# Altium PCB NEOIVClock.PcbDoc (part 2 of 2)
Units mm, origin at the board's own origin, x right, y up, seen from the top; angles counter-clockwise.
Board outline 205.8 x 119 mm, 2 copper layers (Top Layer, Bottom Layer); 87 components, 87 nets, 479 pads, 552 vias.
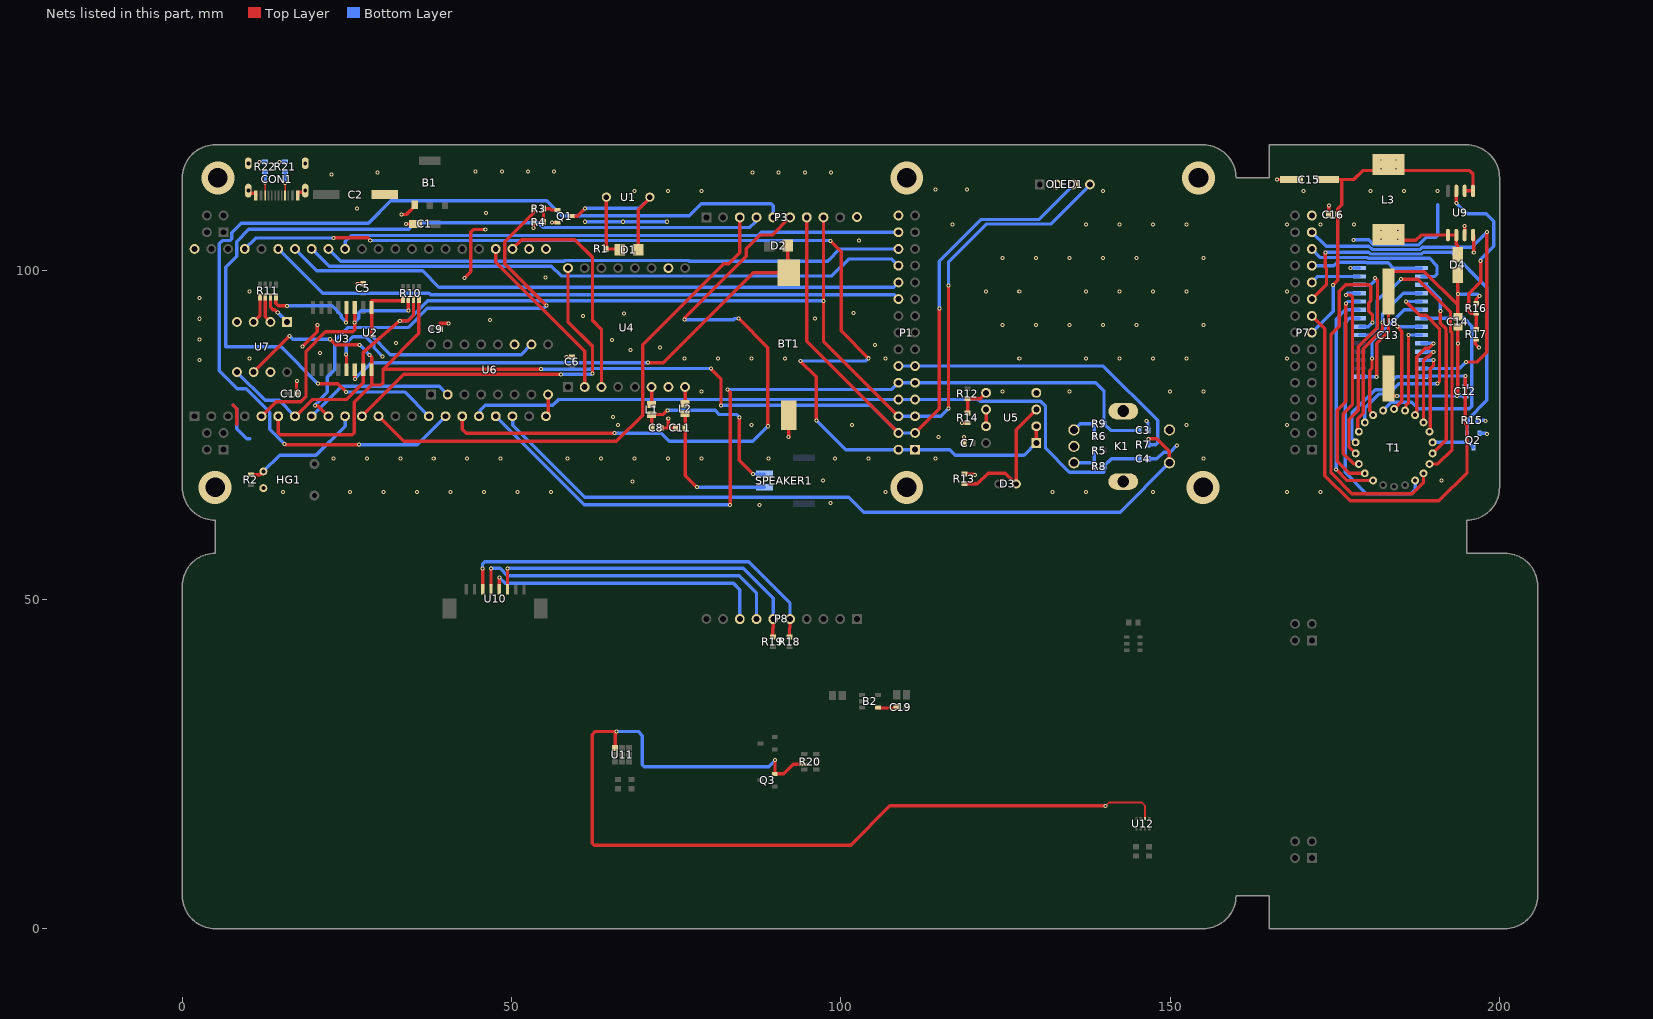
[diagram p2: the nets of this part, all layers, seen from the top]

## Via types
v1: diameter 0.61, hole 0.305, Top Layer to Bottom Layer, 519 vias
v2: diameter 5, hole 3, Top Layer to Bottom Layer, 12 vias
v3: diameter 0.4, hole 0.2, Top Layer to Bottom Layer, 8 vias
v4: diameter 3, hole 2, Top Layer to Bottom Layer, 6 vias
v5: diameter 3.5, hole 2, Top Layer to Bottom Layer, 4 vias
v6: diameter 0.65, hole 0.65, Top Layer to Bottom Layer, 2 vias
v7: diameter 0.61, hole 0.35, Top Layer to Bottom Layer, 1 vias

## Nets (pads, with @x,y where several pads share a name; then routed paths per layer and width w, separated by ;. In a path a pad name is that pad's centre, name@x,y a point inside that pad or via, vN(x,y) a via of type N, cw(c..) or ccw(c..) an arc to the next point about the centre after c; other vN are vias at no path point) (continued)
B_I2C_SDA_1.8: Q3.2 R20.7 U11.1 U12.3 | length 147.9
  Top Layer w0.254: v1(140.208,18.637) 140.716,19.145 145.669,19.145 146.177,18.637 U12.3@146.177,16.754
  Top Layer w0.508: U11.1@65.718,27.434 v1@65.718,29.717 ; v1(65.913,29.94) 62.738,29.94 62.23,29.432 62.23,12.966 62.528,12.668 101.481,12.668 107.45,18.637 v1(140.208,18.637) ; Q3.2@89.937,23.505 Q3.2@89.996,23.505 ; v1(89.996,25.583) Q3.2@89.996,23.505 ; R20.7@94.412,24.949 92.79,24.949 91.346,23.505 Q3.2@89.996,23.505
  Bottom Layer w0.508: v1(65.913,29.94) 69.215,29.94 69.85,29.305 69.85,24.904 70.148,24.606 89.019,24.606 v1(89.996,25.583)
B_PMS5003ST_RESET: P8.5 R18.2 U10.6 | length 58.5
  Top Layer w0.508: v1(45.593,54.705) 45.613,54.685 45.613,54.404 45.623,54.393 U10.6@45.623,51.509 ; R18.2@92.202,44.279 92.202,45.598 92.27,45.666 P8.5@92.27,47
  Bottom Layer w0.508: v1(45.593,54.705) 45.593,55.423 45.891,55.721 85.994,55.721 92.27,49.445 P8.5@92.27,47
B_PMS5003ST_RX: P8.7 U10.5 | length 48.5
  Top Layer w0.508: v1(46.863,54.705) 46.863,53.359 46.873,53.349 U10.5@46.873,52.055
  Bottom Layer w0.508: v1(46.863,54.705) 48.245,54.705 49.356,53.594 84.55,53.594 87.19,50.954 P8.7@87.19,47
B_PMS5003ST_SET: P8.6 R19.1 U10.3 | length 50.8
  Top Layer w0.508: U10.3@49.373,52.055 49.373,54.647 49.403,54.677 v1(49.403,54.705) ; R19.1@89.662,44.279 89.662,45.598 89.73,45.666 P8.6@89.73,47
  Bottom Layer w0.508: v1@49.435,54.737 49.447,54.725 49.495,54.725 49.507,54.737 85.185,54.737 89.73,50.192 P8.6@89.73,47
B_PMS5003ST_TX: P8.8 U10.4 | length 43.4
  Top Layer w0.508: U10.4@48.133,51.626 v1(48.133,53.308)
  Bottom Layer w0.508: v1(48.133,53.308) 49.022,52.419 83.693,52.419 84.65,51.462 P8.8@84.65,47
BEEPER: R3.1 U2.9 | length 67.4
  Top Layer w0.508: v1(20.134,79.434) 20.154,79.415 20.578,79.415 U2.9@22.19,77.803 ; R3.1@53.352,109.313 53.352,108.726 48.95,104.324 48.95,100.928 v1(55.3,94.578)
  Bottom Layer w0.508: v1(20.134,79.434) 20.995,80.295 20.995,80.442 22.026,81.472 22.026,83.758 23.143,84.876 23.143,89.262 25.146,91.265 34.282,91.265 37.189,94.172 54.893,94.172 v1(55.3,94.578)
DPF_PLAYER_BSY: U2.11 U4.16 | length 55.2
  Top Layer w0.508: U2.11@27.27,77.803 33.62,84.153 v1(57.465,84.153) ; U4.16@58.561,100.282 58.561,92.13 62.285,88.406 v1(62.285,84.28)
  Bottom Layer w0.508: v1(57.465,84.153) 62.13,84.153 62.257,84.28 v1(62.285,84.28)
DPF_PLAYER_RX: U2.25 U4.3 | length 34.1
  Top Layer w0.508: U2.25@50.13,103.203 51.513,104.586 59.618,104.586 62.285,101.919 62.285,92.394 63.641,91.038 U4.3@63.641,82.248
DPF_PLAYER_TX: U2.26 U4.2 | length 26.6
  Top Layer w0.508: U2.26@47.59,103.203 47.59,101.196 61.101,87.685 U4.2@61.101,82.248
DS3231_32HZ: R10.5 U3.1 U6.10 | length 36.4
  Top Layer w0.508: v1(28.744,89.994) U3.1@28.744,94.302 28.744,95.315 33.513,95.315 R10.5@33.513,95.521
  Bottom Layer w0.508: v1(28.744,89.994) 31.601,87.136 51.436,87.136 U6.10@53.001,88.701
DS3231_CLK: U2.8 U6.2 | length 23.1
  Bottom Layer w0.508: U2.8@19.65,77.803 24.222,82.375 39.007,82.375 U6.2@40.301,81.081
DS3231_INT: R10.6 U2.5 U3.3 | length 38
  Top Layer w0.508: U2.5@12.03,77.803 14.251,80.024 17.969,80.024 18.796,80.851 18.796,87.691 21.735,90.63 25.864,90.63 26.162,90.928 26.162,92.055 26.204,92.096 U3.3@26.204,94.302 ; v1(34.313,93.842) R10.6@34.313,95.521
  Bottom Layer w0.508: v1(26.162,92.027) 26.162,92.055 26.772,92.664 26.772,93.483 27.131,93.842 v1(34.313,93.842)
DS3231_RST: R11.4 U3.4 | length 15.4
  Top Layer w0.508: R11.4@14.196,95.902 14.196,94.976 14.585,94.587 15.855,94.587 v1(15.875,94.567) ; v1(24.892,92.027) 24.892,92.055 24.934,92.096 U3.4@24.934,94.302
  Bottom Layer w0.508: v1(15.875,94.567) 22.733,94.567 24.148,93.152 24.148,92.792 24.892,92.049 v1(24.892,92.027)
EC11_A: C3.2 P1.9 P1.10 R9.2 U2.19 | length 127.6
  Top Layer w0.508: v1(82.804,81.867) 82.804,81.839 83.185,81.458 v1(83.185,64.341)
  Bottom Layer w0.508: U2.19@47.59,77.803 61.052,64.341 v1(83.185,64.341) ; v1(82.804,81.867) 107.717,81.867 P1.10@108.73,82.88 P1.9@111.27,82.88 138.712,82.88 139.942,81.65 R9.2@139.942,76.66 140.958,75.644 C3.2@145.223,75.644
EC11_B: C4.2 P1.7 P1.8 R8.2 U2.18 | length 111.3
  Bottom Layer w0.508: U2.18@45.05,77.803 45.24,77.993 45.24,78.72 45.974,79.454 56.261,79.454 57.147,80.34 P1.8@108.73,80.34 P1.7@111.27,80.34 120.871,80.34 121.136,80.075 130.306,80.075 131.068,79.313 131.068,72.938 134.7,69.305 139.942,69.305 R8.2@139.942,70.183 141.085,71.326 C4.2@145.223,71.326
EC11_C: K1.3 P1.11 P1.12 R7.2 U2.20 | length 163.9
  Top Layer w0.508: v1(146.673,74.36) 147.969,74.36 149.875,72.454 K1.3@149.875,70.731
  Bottom Layer w0.508: U2.20@50.165,77.768 50.165,76.406 61.087,65.484 101.219,65.484 103.457,63.246 142.39,63.246 K1.3@149.875,70.731 ; P1.12@108.73,85.42 P1.11@111.27,85.42 139.845,85.42 148.082,77.183 148.082,73.783 147.784,73.485 R7.2@146.673,73.485 v1(146.673,74.36)
GND: B1.1 BT1.2 C1.2 C2.2 C3.1 C4.1 C5.1 C6.2 C7.1 C8.1 C9.1 C10.1 C11.2 CON1.1 CON1.2 CON1.13 HG1.1 K1.1 K1.2 K1.5 OLED1.2 P1.30 P3.10 Q1.2 R4.2 R13.2 R14.2 R21.2 R22.2 U2.22 U2.23 U2.24 U2.44 U3.13 U4.7 U4.10 U5.4 U6.8 U6.11 U7.4 U7.7 | length 85
  Top Layer w0.5: 7.747,79.454 8.255,78.946 8.255,76.533 ; CON1.2@17.549,111.305 17.549,111.805 18.438,111.805 18.669,112.036 CON1.1@18.669,112.055 ; v1(42.826,98.774) 43.815,99.763 43.815,105.743 44.212,106.14 v1(46.001,106.14)
  Top Layer w0.508: CON1.1@10.176,111.633 10.223,111.68 11.145,111.68 11.149,111.676 CON1.13@11.149,111.305 ; C10.1@17.337,81.232 17.337,83.047 17.399,83.109 v1(17.399,83.137) ; v1(18.24,88.386) 20.506,90.652 20.506,91.668 v1(20.526,91.688) ; v1(24.892,87.201) 24.892,87.173 24.934,87.132 U3.13@24.934,84.878 ; v1(26.592,97.91) C5.1@27.474,97.91 ; v1(33.274,108.41) 33.294,108.43 34.02,108.43 35.302,109.711 B1.1@35.302,109.886 ; v1(33.998,106.999) C1.2@35.43,106.999 ; C9.1@39.181,91.011 39.181,91.893 v1(40.451,91.893) ; v1(53.352,106.399) R4.2@53.352,107.281 ; U2.22@55.21,77.803 55.21,78.071 55.541,78.402 U6.8@55.541,81.081 ; v1(56.107,107.22) Q1.2@56.964,107.22 ; v1(58.314,86.758) C6.2@59.196,86.758 ; C8.1@72.807,76.221 72.807,76.171 C8.1@72.661,76.025 73.801,76.025 ; v1(73.787,77.422) 73.787,76.039 73.801,76.025 ; C11.2@74.941,76.025 73.801,76.025 ; C11.2@74.991,76.025 C11.2@75.087,76.025 ; v1(92.075,74.628) BT1.2@92.075,77.946 ; v1(118.371,76.791) R14.2@119.253,76.791 ; C7.1@118.672,73.731 v1(118.672,74.613) ; R13.2@118.745,69.028 120.253,69.028 120.368,68.913 v1(120.396,68.913)
  Bottom Layer w0.5: 7.747,79.454 8.255,78.946 8.255,75.898 9.779,74.374 10.287,74.374 ; v1(24.892,87.201) 24.892,88.852 25.908,89.868 27.839,89.868 29.12,88.587 29.12,88.162 v1(30.421,86.86)
  Bottom Layer w0.508: v1(11.691,116.399) R22.2@12.573,116.399 ; v1(14.739,116.399) R21.2@15.621,116.399 ; v1(61.164,107.329) v1(66.879,107.329) v1(73.61,107.329) ; v1(146.424,77.048) 146.424,77.02 146.623,76.821 C3.1@146.623,75.644 ; C4.1@146.623,71.326 147.99,71.326 148.996,72.332 149.977,72.332 v1(151.003,73.358)
  other v1: 87.657,64.357 98.452,64.611 15.32,66.28 25.48,66.28 30.56,66.28 35.64,66.28 40.72,66.28 45.8,66.28 50.88,66.28 55.96,66.28 106.76,66.28 132.16,66.28 137.24,66.28 147.4,66.28 68.353,67.913 97.309,68.04 22.94,71.36 28.02,71.36 33.1,71.36 38.18,71.36 43.26,71.36 48.34,71.36 58.5,71.36 63.58,71.36 68.66,71.36 73.74,71.36 78.82,71.36 88.98,71.36 99.14,71.36 104.22,71.36 114.38,71.36 155.02,71.36 114.835,74.644 66.12,76.44 86.44,76.44 101.68,76.44 152.48,76.44 65.405,77.676 78.82,81.52 124.54,81.52 134.7,81.52 149.94,81.52 155.02,81.52 2.619,86.354 10.24,86.6 76.28,86.6 81.36,86.6 86.44,86.6 91.52,86.6 106.76,86.6 127.08,86.6 137.24,86.6 142.32,86.6 147.4,86.6 152.48,86.6 20.907,87.37 68.072,87.836 72.517,88.217 105.183,88.614 32.418,88.955 65.278,89.36 2.619,89.478 124.54,91.68 129.62,91.68 134.7,91.68 139.78,91.68 144.86,91.68 155.02,91.68 46.736,92.408 2.619,92.602 96.045,92.638 60.833,93.043 67.056,93.424 101.881,93.44 2.619,95.726 10.24,96.76 122,96.76 127.08,96.76 137.24,96.76 142.32,96.76 147.4,96.76 152.48,96.76 55.145,98.901 124.54,101.84 129.62,101.84 134.7,101.84 139.78,101.84 144.86,101.84 155.02,101.84 102.77,104.489 116.92,106.92 137.24,106.92 142.32,106.92 147.4,106.92 152.48,106.92 46.101,108.664 26.5,109.312 68.66,112 73.74,112 78.82,112 139.78,112 114.327,112.236 119.153,112.236 22.633,114.522 86.566,114.802 90.545,114.802 94.524,114.802 98.504,114.802 29.643,114.815 44.529,114.929 48.508,114.929 52.487,114.929 56.467,114.929
  other v2: 5,67 110,67 155,67 5.395,114 110,114 154.305,114
I2C_SCL: OLED1.3 P1.3 P1.4 P3.7 R10.8 U2.6 U3.16 U7.6 | length 244.2
  Top Layer w0.508: U7.6@10.837,84.51 10.837,84.53 16.257,89.95 v1(16.257,89.97) ; U2.6@14.57,77.803 14.57,75.307 14.868,75.009 25.792,75.009 26.09,75.307 26.09,79.897 28.744,82.551 ; v1(22.45,89.488) 23.299,88.64 v1(26.924,88.64) ; v1(28.448,87.074) 28.448,87.046 28.744,86.751 28.744,82.551 ; R10.8@35.913,95.521 35.913,90.392 30.48,84.96 ; v1(54.483,84.96) 30.48,84.96 ; v1(80.264,85.042) 81.788,83.518 v1(81.788,79.454) ; P3.7@94.81,108 94.81,89.18 P1.4@108.73,75.26 ; P1.3@110.977,74.967 P1.3@111.27,75.26 114.935,78.925 v1(114.935,94.186) ; 28.744,82.551 30.182,82.551 30.48,82.849 30.48,84.96
  Bottom Layer w0.508: v1(16.257,89.97) 16.284,89.97 16.766,89.488 v1(22.45,89.488) ; v1(26.924,88.64) 26.924,88.619 28.448,87.095 v1(28.448,87.074) ; v1(54.483,84.96) 61.933,84.96 62.016,85.042 v1(80.264,85.042) ; v1(81.788,79.454) 104.536,79.454 P1.4@108.73,75.26 P1.3@111.27,75.26 ; v1(114.935,94.186) 114.935,101.298 121.314,107.677 130.109,107.677 135.288,112.856 OLED1.3@135.288,112.982
I2C_SDA: OLED1.4 P1.5 P1.6 P3.8 R10.7 U2.7 U3.15 U7.5 | length 198.1
  Top Layer w0.508: U2.7@17.11,77.803 17.236,77.803 19.776,80.343 24.961,80.343 27.474,82.856 U3.15@27.474,84.878 27.474,87.477 27.635,87.638 32.001,91.43 v1@32.992,92.281 ; v1(33.02,92.281) 34.29,92.281 35.113,93.104 R10.7@35.113,95.521 ; P3.8@97.35,108 v1(97.35,95.315) 97.35,89.18 P1.6@108.73,77.8 ; v1(116.332,78.946) v1(116.332,97.615)
  Bottom Layer w0.508: U7.5@8.297,84.51 12.591,80.216 14.697,80.216 U2.7@17.11,77.803 ; v1(33.02,92.281) 34.232,92.281 37.266,95.315 v1(97.35,95.315) ; P1.6@108.73,77.8 P1.5@111.27,77.8 115.186,77.8 v1(116.332,78.946) ; v1(116.332,97.615) 116.332,101.171 122.16,106.999 131.971,106.999 137.81,112.838 OLED1.4@137.81,113
IV18_BLANK: P1.22 U2.38 | length 94.3
  Bottom Layer w0.508: U2.38@17.11,103.203 20.426,99.887 36.478,99.887 38.967,97.398 108.008,97.398 P1.22@108.73,98.12
IV18_CLK: P1.24 U2.37 | length 92.3
  Bottom Layer w0.508: U2.37@19.65,103.203 22.28,100.573 56.036,100.573 57.509,99.1 98.632,99.1 101.197,101.665 107.725,101.665 P1.24@108.73,100.66
IV18_DIN: P1.28 U2.35 | length 85.7
  Bottom Layer w0.508: U2.35@24.73,103.203 24.73,104.344 25.621,105.235 87.376,105.235 87.881,105.74 P1.28@108.73,105.74
IV18_EN: P1.20 U2.39 | length 97.3
  Bottom Layer w0.508: U2.39@14.57,103.203 21.315,96.458 37.469,96.458 37.697,96.229 108.081,96.229 P1.20@108.73,95.58
IV18_LOAD: P1.26 U2.36 | length 88.2
  Bottom Layer w0.508: U2.36@22.19,103.203 24.042,101.351 57.97,101.351 58.075,101.456 76.827,101.456 76.932,101.351 97.988,101.351 99.837,103.2 P1.26@108.73,103.2
LIGHT_SENSOR: P1.1 P1.2 U2.41 U5.1 U5.2 | length 169.5
  Top Layer w0.508: v1@22.983,104.889 22.999,104.874 23.075,104.874 23.09,104.889 28.191,104.889 28.52,104.56 28.52,104.493 v1(28.54,104.473) ; v1(93.853,86.185) 96.266,83.772 v1(96.266,77.168) ; v1(98.429,104.383) 100.029,102.783 100.029,90.743 v1(104.169,86.603) ; U5.1@129.667,73.739 U5.2@129.667,76.279
  Bottom Layer w0.508: U2.41@9.49,103.203 11.141,104.854 v1(22.983,104.854) ; v1(28.54,104.473) 98.311,104.473 98.401,104.383 v1(98.429,104.383) ; v1(93.853,86.185) 103.724,86.185 104.142,86.603 v1(104.169,86.603) ; v1(96.266,77.168) 100.714,72.72 P1.2@108.73,72.72 P1.1@111.27,72.72 116.514,72.72 117.357,71.877 127.805,71.877 U5.1@129.667,73.739
MOTION_SW: HG1.2 R2.2 U2.10 | length 18.9
  Top Layer w0.508: R2.2@10.414,68.913 11.811,68.913 HG1.2@12.319,69.421
  Bottom Layer w0.508: HG1.2@12.319,69.421 14.778,71.881 20.302,71.881 24.73,76.308 U2.10@24.73,77.803
NetB2_4: B2.4 C19.2 | length 2.8
  Top Layer w0.508: B2.4@105.625,33.562 105.691,33.496 C19.2@108.393,33.496
NetBT1_1: BT1.1 D2.2 U3.14 | length 78.1
  Top Layer w0.508: v1(26.191,83.479) 26.204,83.491 U3.14@26.204,84.878 ; v1(70.717,85.942) 73.036,85.942 86.69,99.596 BT1.1@92.075,99.596 92.075,101.589 91.951,101.713 D2.2@91.951,103.711
  Bottom Layer w0.508: v1(26.191,83.479) 28.655,85.942 v1(70.717,85.942)
NetC8_2: C8.2 L1.1 SPEAKER1.2 | length 27.3
  Top Layer w0.508: C8.2@71.261,76.025 L1.1@71.261,78.069 73.009,78.069 73.632,78.692 v1(73.66,78.692) ; v1(84.582,77.582) 84.582,71.113 v1(86.669,69.026)
  Bottom Layer w0.508: v1(73.66,78.692) 80.899,78.692 81.534,78.057 84.21,78.057 84.562,77.704 84.562,77.629 v1@84.582,77.629 ; v1(86.669,69.026) 86.671,69.024 SPEAKER1.2@88.392,69.024
NetC11_1: C11.1 L2.1 SPEAKER1.1 | length 22.2
  Top Layer w0.508: L2.1@76.341,78.196 C11.1@76.341,76.025 76.341,68.797 v1(78.114,67.024)
  Bottom Layer w0.508: v1(78.114,67.024) SPEAKER1.1@88.392,67.024
NetCON1_5: CON1.5 R21.1 | length 3.6
  Top Layer w0.254: CON1.5@15.599,111.305 15.601,111.307 15.601,112.005 15.621,112.025 v1(15.621,113.236)
  Bottom Layer w0.508: v1(15.621,113.236) R21.1@15.621,114.899
NetCON1_11: CON1.11 R22.1 | length 4.3
  Top Layer w0.254: v1@12.573,113.188 v1(12.573,113.284) 12.597,113.26 12.597,111.307 CON1.11@12.599,111.305 CON1.11@12.599,111.926
  Bottom Layer w0.508: v1(12.573,113.284) R22.1@12.573,114.899
NetD1_1: D1.1 Q1.3 U1.2 | length 22
  Top Layer w0.508: Q1.3@59.114,108.17 59.973,108.17 v1(61.164,109.361) ; D1.1@69.218,103.076 69.218,109.177 U1.2@71.118,111.077
  Bottom Layer w0.508: v1(61.164,109.361) 69.402,109.361 U1.2@71.118,111.077
NetD1_2: D1.2 R1.2 U1.1 | length 10
  Top Layer w0.508: U1.1@64.391,111.077 64.391,107.064 64.377,107.05 R1.2@64.377,103.203 66.291,103.203 D1.2@66.418,103.076
NetD3_1: D3.1 R13.1 U5.3 | length 21.8
  Top Layer w0.508: R13.1@118.745,67.528 120.73,67.528 122.369,69.167 124.968,69.167 D3.1@126.619,67.516 126.619,75.771 U5.3@129.667,78.819
NetD4_1: D4.1 L3.2 U9.5 U9.6 | length 13.6
  Top Layer w0.508: L3.2@183.261,104.507 187.303,104.507 188.111,105.315 U9.5@192.17,105.315 U9.6@193.44,105.315 193.44,103.916 193.659,103.697 D4.1@193.659,102.316
  other v3: 181.994,104.696 184.534,104.696 181.994,105.996 184.534,105.996
NetK1_4: K1.4 R6.2 R9.1 | length 5.4
  Bottom Layer w0.508: K1.4@135.375,75.731 136.304,76.66 R9.1@138.442,76.66 R6.2@138.442,74.755
NetK1_6: K1.6 R5.2 R8.1 | length 5.5
  Bottom Layer w0.508: K1.6@135.375,70.731 138.442,70.731 ; R8.1@138.442,70.183 138.442,70.731 ; R5.2@138.442,72.596 138.442,70.731
NetL1_2: L1.2 U4.6 | length 2.7
  Top Layer w0.508: L1.2@71.261,79.569 U4.6@71.261,82.248
NetL2_2: L2.2 U4.8 | length 2.6
  Top Layer w0.508: L2.2@76.341,79.696 U4.8@76.341,82.248
NetQ1_1: Q1.1 R3.2 R4.1 | length 4.2
  Top Layer w0.508: R4.1@54.852,107.281 R3.2@54.852,109.313 55.808,109.313 56.001,109.12 Q1.1@56.964,109.12
NetQ2_3: Q2.3 T1.13 | length 6.5
  Bottom Layer w0.508: T1.13@189.84,73.84 195.242,73.84 Q2.3@196.021,73.06
NetR11_1: R11.1 U7.3 | length 4.2
  Top Layer w0.508: U7.3@10.837,92.13 11.796,93.089 R11.1@11.796,95.902
NetR11_2: R11.2 U7.2 | length 4.1
  Top Layer w0.508: R11.2@12.596,95.902 12.596,92.911 U7.2@13.377,92.13
NetR11_3: R11.3 U7.1 | length 5
  Top Layer w0.508: R11.3@13.396,95.902 13.396,94.337 13.755,93.978 14.041,93.978 14.468,93.551 v1(14.496,93.551)
  Bottom Layer w0.508: v1(14.496,93.551) U7.1@15.917,92.13
NetR12_2: R12.2 R14.1 U5.5 | length 5.3
  Top Layer w0.508: R14.1@119.253,78.291 R12.2@119.253,80.474 121.162,80.474 U5.5@122.047,81.359
NetR16_2: R16.2 R17.1 U9.3 | length 27.5
  Top Layer w0.508: U9.3@193.44,112.015 193.447,112.008 193.447,110.171 v1(193.454,110.164) ; R17.1@196.466,91 R16.2@196.466,93.34 ; R16.2@196.469,93.436 196.453,93.452 195.624,93.452 195.326,93.75 195.326,96.403 197.137,98.215 v1(197.137,101.401)
  Bottom Layer w0.508: v1(193.454,110.164) 195.081,108.537 197.993,108.537 199.136,107.394 199.136,103.645 197.157,101.665 197.157,101.42 v1(197.137,101.401)
NetU5_6: U5.6 U5.7 | length 2.5
  Top Layer w0.508: U5.7@122.047,76.279 U5.6@122.047,78.819
PMS5003ST_RESET: P3.6 U2.17 | length 99.8
  Top Layer w0.508: U2.17@42.51,77.803 42.51,75.806 43.092,75.224 v1(65.637,75.224) ; v1(76.276,92.459) 76.295,92.479 76.295,92.757 85.631,102.093 85.631,103.251 87.689,105.309 89.579,105.309 P3.6@92.27,108 ; v1(84.455,92.662) 88.9,88.217 v1(88.9,76.279)
  Bottom Layer w0.508: v1(65.637,75.224) 72.728,75.224 73.924,74.027 86.648,74.027 v1(88.9,76.279) ; v1(76.276,92.459) 83.718,92.459 83.901,92.642 84.435,92.642 v1(84.455,92.662)
PMS5003ST_RX: P3.4 U2.15 | length 133.2
  Top Layer w0.508: v1(20.583,82.747) 23.631,82.747 v1(24.892,81.486)
  Bottom Layer w0.508: v1(20.583,82.747) 14.999,88.331 6.604,88.331 6.604,100.409 8.255,102.06 8.255,104.328 10.113,106.186 34.421,106.186 35.386,107.151 54.08,107.151 54.766,106.466 86.194,106.466 87,107.272 87,107.81 P3.4@87.19,108 ; v1(24.892,81.486) 33.747,81.486 U2.15@37.43,77.803
PMS5003ST_SET: P3.5 U2.16 | length 152.5
  Top Layer w0.508: v1(15.494,73.612) 15.522,73.612 15.649,73.485 v1@26.821,73.485
  Bottom Layer w0.508: v1(15.494,73.612) 13.288,75.818 13.288,78.373 9.681,81.98 8.31,81.98 5.588,84.702 5.588,103.965 6.096,104.473 7.199,104.473 7.497,104.771 7.497,105.653 8.97,107.126 28.274,107.126 31.652,110.504 55.35,110.504 57.636,108.218 76.966,108.218 78.809,110.061 89.432,110.061 89.73,109.763 P3.5@89.73,108 ; v1(26.848,73.485) 35.652,73.485 U2.16@39.97,77.803
PMS5003ST_TX: P3.3 U2.12 | length 79.9
  Top Layer w0.508: U2.12@29.81,77.803 33.634,73.979 65.917,73.979 69.905,77.967 69.905,88.653 82.204,100.952 82.966,100.952 84.65,102.636 P3.3@84.65,108
R_3.3V: C12.2 P7.17 T1.1 U8.28 | length 90.8
  Top Layer w0.508: P7.17@171.5,93.04 173.482,91.058 173.482,68.786 177.306,64.962 190.783,64.962 195.072,69.251 195.072,76.434 194.818,76.688 v1(194.818,83.899)
  Bottom Layer w0.508: T1.1@178.16,73.84 177.601,74.4 177.601,78.348 181.098,81.845 182.409,81.845 184.351,83.787 U8.28@188.161,83.787 188.232,83.858 189.126,83.858 189.167,83.899 v1(194.818,83.899) C12.2@194.818,82.167
R_5V: C15.1 C16.2 L3.1 P7.15 U9.1 U9.2 | length 51.9
  Top Layer w0.508: C15.1@173.863,113.744 176.045,113.744 ; v1(174.752,97.742) 174.752,97.77 175.452,98.47 175.452,109.292 176.045,109.885 176.045,113.744 ; U9.2@194.71,112.015 U9.1@195.98,112.015 195.98,114.578 195.451,115.107 183.261,115.107 179.243,115.107 177.88,113.744 176.045,113.744
  Bottom Layer w0.508: P7.15@171.5,90.5 174.752,93.752 v1(174.752,97.742)
  other v3: 181.994,115.396 184.274,115.396 181.994,116.696 184.274,116.696
R_50V: C13.1 C14.2 D4.2 R16.1 U8.1 | length 40.7
  Top Layer w0.508: v1(181.356,83.772) 181.356,88.852 183.134,90.63 C13.1@183.134,96.733 ; C13.1@183.131,99.128 183.777,99.774 188.595,99.774 193.659,94.71 ; D4.2@193.659,99.266 v1(193.659,96.346) 193.659,94.71 ; C14.2@194.003,93.082 193.659,93.426 193.659,94.71 ; 196.466,94.556 196.466,95.58 v1(196.977,96.091)
  Bottom Layer w0.508: U8.1@178.736,83.787 178.744,83.78 181.348,83.78 v1(181.356,83.772) ; v1(193.659,96.346) 196.694,96.346 196.949,96.091 v1(196.977,96.091)
R_A: T1.12 U8.17 | length 28.4
  Top Layer w0.508: T1.12@189.84,72.16 191.897,74.217 191.897,90.374 191.873,90.398 191.873,91.069 191.008,91.934 v1(191.008,93.805)
  Bottom Layer w0.508: U8.17@188.161,97.757 188.798,97.757 191.008,95.547 v1(191.008,93.805)
R_B: T1.10 U8.7 | length 58.9
  Top Layer w0.508: v1(180.721,92.027) 180.721,93.17 180.141,93.75 180.141,94.992 180.467,95.319 180.467,97.444 180.169,97.742 176.624,97.742 175.641,96.759 175.641,91.45 174.416,90.225 174.416,69.214 177.575,66.054 186.77,66.054 188.459,67.743 T1.10@188.459,69.136
  Bottom Layer w0.508: U8.7@178.752,91.392 178.759,91.399 180.093,91.399 v1@180.701,92.007
R_C: T1.4 U8.10 | length 31.6
  Top Layer w0.508: v1(176.657,94.948) 176.657,79.985 175.387,78.715 175.387,70.935 177.185,69.137 T1.4@179.541,69.137
  Bottom Layer w0.508: v1(176.657,94.948) 176.685,94.948 176.946,95.21 178.729,95.21 U8.10@178.736,95.217
R_D: T1.3 U8.11 | length 30.7
  Top Layer w0.508: v1(176.664,96.211) 177.375,96.211 177.673,95.913 177.673,79.538 176.276,78.141 176.276,72.137 177.863,70.55 T1.3@178.633,70.55
  Bottom Layer w0.508: v1(176.664,96.211) 176.692,96.211 176.969,96.487 U8.11@178.736,96.487
R_DP: T1.2 U8.12 | length 32
  Top Layer w0.508: T1.2@178.16,72.161 177.136,73.185 177.136,77.27 178.562,78.696 178.562,88.367 181.483,91.288 181.483,98.349 181.102,98.73 v1(181.102,98.758)
  Bottom Layer w0.508: U8.12@178.736,97.757 180.482,97.757 181.082,98.357 181.082,98.738 v1(181.102,98.758)
R_E: T1.5 U8.9 | length 33.3
  Top Layer w0.508: v1(175.188,69.737) 176.888,68.037 T1.5@180.81,68.037
  Bottom Layer w0.508: v1(175.188,69.737) 175.188,92.525 176.61,93.947 U8.9@178.736,93.947
R_F: T1.11 U8.6 | length 47.2
  Top Layer w0.508: v1(185.064,98.61) 187.6,98.61 192.551,93.659 192.551,90.678 192.786,90.443 192.786,72.705 190.63,70.549 T1.11@189.367,70.549
  Bottom Layer w0.508: U8.6@178.736,90.137 180.42,90.137 181.45,91.167 181.45,95.405 182.858,96.813 183.266,96.813 v1(185.064,98.61)
R_G: T1.9 U8.8 | length 38.7
  Bottom Layer w0.508: U8.8@178.736,92.677 177.22,92.677 176.559,92.017 176.559,69.28 179.785,66.054 186.504,66.054 187.189,66.74 T1.9@187.189,68.036
R_G1: T1.15 U8.25 | length 13.3
  Top Layer w0.508: T1.15@188.459,76.864 188.459,86.303 189,86.844 189.226,86.844 189.964,87.582 v1(189.992,87.582)
  Bottom Layer w0.508: U8.25@188.161,87.597 189.977,87.597 v1(189.992,87.582)
R_G2: T1.22 U8.18 | length 26.7
  Top Layer w0.508: T1.22@178.633,75.452 178.49,75.595 178.49,77.451 179.324,78.285 179.324,88.062 182.225,90.964 182.225,92.007 v1(182.245,92.027)
  Bottom Layer w0.508: v1(182.245,92.027) 182.238,92.034 182.238,93.348 185.377,96.487 U8.18@188.161,96.487
R_G3: T1.16 U8.24 | length 14.2
  Top Layer w0.508: T1.16@187.19,77.963 187.322,78.096 187.322,78.477 187.452,78.607 187.452,86.82 188.731,88.099 189.236,88.099 v1(189.992,88.852) v1(189.992,88.852)
  Bottom Layer w0.508: U8.24@188.161,88.867 188.168,88.86 189.984,88.86 v1(189.992,88.852)
R_G4: T1.21 U8.19 | length 32.4
  Top Layer w0.508: v1(185.801,95.202) 187.861,93.142 188.841,93.142 190.881,91.102 190.881,83.071 190.594,82.784 v1(190.594,82.756)
  Bottom Layer w0.508: T1.21@179.542,76.864 179.542,79.019 181.69,81.167 183.087,81.167 184.676,82.756 v1(190.594,82.756) ; v1(185.801,95.202) 185.809,95.21 188.153,95.21 U8.19@188.161,95.217
R_G5: T1.17 U8.23 | length 13.6
  Top Layer w0.508: T1.17@185.662,78.661 185.789,78.788 185.789,79.445 186.182,79.838 v1@186.182,90.094
  Bottom Layer w0.508: v1(186.182,90.122) 186.19,90.13 188.153,90.13 U8.23@188.161,90.137
R_G6: T1.20 U8.20 | length 21
  Top Layer w0.508: v1(180.627,86.566) 180.627,85.075 180.274,84.722 180.274,78.607 180.811,78.07 T1.20@180.811,77.964
  Bottom Layer w0.508: v1(180.627,86.566) 180.627,89.074 185.5,93.947 U8.20@188.161,93.947
R_G7: T1.19 U8.21 | length 34.9
  Bottom Layer w0.508: T1.19@182.339,78.661 182.339,78.667 182.976,79.305 182.976,79.324 183.576,79.924 186.677,79.924 187.655,78.946 195.409,78.946 195.801,79.338 195.801,91.491 194.615,92.677 U8.21@188.161,92.677
R_G8: T1.18 U8.22 | length 16.9
  Top Layer w0.508: T1.18@184,78.9 185.166,80.066 185.166,90.729 184.531,91.364 v1(184.531,91.392)
  Bottom Layer w0.508: v1(184.531,91.392) 184.539,91.4 188.153,91.4 U8.22@188.161,91.407
R_G9: T1.14 U8.26 | length 13
  Top Layer w0.508: T1.14@189.367,75.451 189.483,75.567 189.483,84.991 189.972,85.481 189.972,86.292 v1(189.992,86.312)
  Bottom Layer w0.508: U8.26@188.161,86.327 188.168,86.32 189.984,86.32 v1(189.992,86.312)
R_GND: C12.1 C13.2 C14.1 C15.2 C16.1 P7.29 Q2.2 R15.2 R17.2 U8.14 U9.7 U9.8 | length 57.8
  Top Layer w0.508: v1(166.206,113.744) C15.2@168.388,113.744 ; C16.1@174.052,108.41 174.052,109.714 174.117,109.779 v1(174.117,109.807) ; C13.2@183.131,84.803 183.131,80.871 v1(184.401,80.871) ; v1(193.548,80.851) 193.548,80.879 193.675,81.006 193.675,90.796 C14.1@193.675,91.404 ; U9.7@194.71,105.315 v1(194.71,106.697) ; U9.8@195.98,105.315 196.088,105.207 v1(196.088,102.695) ; R17.2@196.466,89.5 196.295,89.5 196.295,88.789 v1(196.854,88.23)
  Bottom Layer w0.508: v1(177.342,100.297) U8.14@178.736,100.297 ; v1(177.846,104.573) 180.148,104.573 180.926,103.795 187.663,103.795 188.849,104.981 190.329,104.981 190.627,105.279 190.627,109.801 190.6,109.828 190.6,109.9 190.58,109.92 ; v1(184.401,80.871) 184.411,80.861 193.538,80.861 v1(193.548,80.851) 193.568,80.871 194.798,80.871 C12.1@194.818,80.851 ; R15.2@196.644,77.183 197.696,77.183 197.838,77.041 v1(197.866,77.041) ; Q2.2@196.971,75.21 198.018,75.21 198.092,75.136 v1(198.12,75.136)
  other v1: 167.72,66.28 172.8,66.28 191.162,68.04 167.72,76.44 167.72,86.6 193.675,88.852 167.72,96.76 167.72,106.92 172.8,106.92 177.88,106.92 170.26,112 180.42,112 185.5,112 190.58,112
R_IV18_BLANK: P7.21 U8.13 | length 7.6
  Bottom Layer w0.508: P7.21@171.5,98.12 172.407,99.027 U8.13@178.736,99.027
R_IV18_CLK: P7.23 U8.15 | length 17.2
  Bottom Layer w0.508: P7.23@171.5,100.66 174.857,100.66 175.354,101.157 179.729,101.157 179.803,101.083 183.085,101.083 183.886,100.282 U8.15@188.146,100.282
R_IV18_DIN: P7.27 U8.27 | length 57.9
  Top Layer w0.508: v1(194.945,86.058) 194.959,86.044 196.6,86.044 198.073,87.517 v1(198.073,105.74)
  Bottom Layer w0.508: P7.27@171.5,105.74 173.656,103.584 180.179,103.584 180.646,103.117 187.944,103.117 188.284,103.457 195.79,103.457 v1(198.073,105.74) ; U8.27@188.161,85.057 193.944,85.057 v1(194.945,86.058)
R_IV18_EN: P7.19 Q2.1 R15.1 | length 58.4
  Top Layer w0.508: P7.19@171.5,95.58 173.736,97.816 173.736,100.242 173.556,100.421 v1(173.556,102.693)
  Bottom Layer w0.508: v1@173.584,102.693 180.111,102.693 180.365,102.439 188.225,102.439 188.481,102.695 192.725,102.695 198.073,97.347 198.073,80.212 195.144,77.283 195.144,76.211 195.071,76.138 Q2.1@195.071,75.21
R_IV18_LOAD: P7.25 U8.16 | length 23.9
  Bottom Layer w0.508: P7.25@171.5,103.2 172.81,101.89 179.955,101.89 180.084,101.761 189.402,101.761 190.5,100.663 190.5,99.325 190.202,99.027 U8.16@188.161,99.027
pads on no net: CON1.4 CON1.6 CON1.7 CON1.8 CON1.9 CON1.10 HG1.0 P1.13 P1.14 P1.15 P1.17 P1.19 P1.21 P1.23 P1.25 P1.27 P1.29 P2.1 P2.2 P2.3 P2.4 P3.9 P4.1 P4.2 P4.3 P4.4 P5.1 P5.2 P5.3 P5.4 P6.1 P6.2 P6.3 P6.4 P7.1 P7.2 P7.3 P7.4 P7.5 P7.6 P7.7 P7.8 P7.9 P7.10 P7.11 P7.12 P7.13 P7.14 P7.16 P7.18 P7.20 P7.22 P7.24 P7.26 P7.28 P7.30 P8.2 SPEAKER1.0 T1.6 T1.7 T1.8 U2.1 U2.2 U2.3 U2.4 U2.13 U2.14 U2.27 U2.28 U2.30 U2.31 U2.32 U2.33 U2.34 U2.40 U2.42 U2.43 U3.5 U3.6 U3.7 U3.8 U3.9 U3.10 U3.11 U3.12 U4.4 U4.5 U4.9 U4.11 U4.12 U4.13 U4.14 U4.15 U6.1 U6.3 U6.4 U6.5 U6.6 U6.7 U6.9 U6.12 U6.13 U6.14 U6.15 U8.2 U8.3 U8.4 U8.5 U9.4 U10.7 U10.8 U11.6 U13.1 U13.6
copper on no net:
  other v4: 12.044,6.963 57.044,6.963 12.044,39.963 57.044,39.963 80.19,75.951 103.96,99.721
  other v5: 122.35,88.7 145.65,88.7 122.35,112.5 145.65,112.5
  other v6: 11.459,112.555 17.239,112.555

## Polygon pours and split planes (outlines as drawn)
GND on Top Layer "Top Layer-GND" (solid, remove dead copper, pour order 0): 0,67 0,114 cw(c5,114) 5,119 155,119 cw(c155,114) 160,114 160,67 cw(c155,67) 155,62 5,62 cw(c5,67)
B_GND on Top Layer "Top Layer-B_GND" (solid, remove dead copper, pour order 2): 0,5 0,52 cw(c5,52) 5,57 155,57 cw(c155,52) 160,52 160,5 cw(c155,5) 155,0 5,0 cw(c5,5)
R_GND on Top Layer "Top Layer-R_GND" (solid, remove dead copper, pour order 4): 165,67 165,114 165,119 195,119 cw(c195,114) 200,114 200,67 cw(c195,67) 195,62 165,62
GND on Bottom Layer "Bottom Layer-GND" (solid, remove dead copper, pour order 1): 5,62 cw(c5,67) 0,67 0,114 cw(c5,114) 5,119 155,119 cw(c155,114) 160,114 160,67 cw(c155,67) 155,62
R_GND on Bottom Layer "Bottom Layer-R_GND" (solid, remove dead copper, pour order 5): 165,67 165,114 165,119 195,119 cw(c195,114) 200,114 200,67 cw(c195,67) 195,62 165,62
B_GND on Bottom Layer "Bottom Layer-B_GND" (solid, remove dead copper, pour order 3): 0,5 0,52 cw(c5,52) 5,57 155,57 cw(c155,52) 160,52 160,5 cw(c155,5) 155,0 5,0 cw(c5,5)

## Keep-outs
Keep-Out Layer:
  circle w0.254: c192.5,11 r9
  lines w0.254: -16.661,62 5,62 ; -16.614,57 5,57 ; 142.383,40.1 cw(c142.383,41.116) 141.367,41.116 141.367,46.577 cw(c142.383,46.577) 142.383,47.593 146.447,47.593 cw(c146.447,46.577) 147.463,46.577 147.463,41.122 cw(c146.447,41.122) 146.518,40.108 ; 142.456,40.112 cw(c142.053,39.465) 142.053,38.703 141.367,38.703 cw(c141.367,39.719) 140.351,39.719 140.351,47.593 cw(c141.367,47.593) 141.367,48.609 147.463,48.609 cw(c147.463,47.593) 148.479,47.593 148.479,39.719 cw(c147.463,39.719) 147.463,38.703 ; 146.552,40.112 ccw(c146.955,39.465) 146.955,38.703 ; 146.955,38.697 147.457,38.697 ; 160,-6.203 160,5 ; 160,133.203 160,114 ; 164.991,42.47 164.991,52.009 ; 164.991,57 164.991,52.009 ; 165,-6.196 165,0.012 165,5 ; 165,0 195,0 200.8,0 ccw(c200.8,5) 205.8,5 205.8,52 ccw(c200.8,52) 200.8,57 195,57 ; 165,133.323 165,119 ; 218.186,62 195,62 ; 218.209,57 195,57 ; 5,57 ccw(c5,52) 0,52 0,5 ccw(c5,5) 5,0 155,0 ccw(c155,5) 160,5 ; 5,57 155,57 ; 5,57 5,62 ; 5,62 cw(c5,67) 0,67 0,114 cw(c5,114) 5,119 155,119 cw(c155,114) 160,114 ; 5,62 155,62 ; 155,57 cw(c155,52) 160,52 ; 155,57 155,62 ; 155,62 ccw(c155,67) 160,67 ; 160,5 160,52 ; 160,5 165,5 ; 160,52 165,52 164.991,52.009 ; 160,67 160,114 ; 160,67 165,67 ; 160,114 165,114 ; 165,5 165,14.53 ; 165,14.53 165,42.47 181,42.47 181,14.53 165,14.53 ; 165,62 165,57 195,57 ; 165,62 165,67 ; 165,62 195,62 ; 165,67 165,114 ; 165,114 165,119 ; 165,119 195,119 cw(c195,114) 200,114 200,67 cw(c195,67) 195,62 ; 195,57 195,62
  text "CNC" at 158.496,58.801 h1.52

## Other copper
Top Layer:
  rectangle net NetD4_1: 180.213,100.992 193.929,107.902
  rectangle net R_GND: 194.31,103.951 197.358,110.061
  rectangle net R_5V: 194.31,111.077 196.469,117.427
  rectangle net R_5V: 171.958,113.236 195.199,117.681
  pour cut-out: 140.351,37.56 140.351,48.609 148.479,48.609 148.479,37.56
Bottom Layer:
  rectangle net B_GND: 65.151,24.606 68.453,28.162
  rectangle net R_5V: 181.37,114.96 184.926,117.119
  rectangle net NetD4_1: 181.61,104.346 185.166,106.505
  pour cut-out: 140.351,37.56 140.351,48.609 148.479,48.609 148.479,37.56

## Silkscreen, mask and mechanical layers (free items; w line width, h text height)
Top Overlay:
  drawing of 8 lines, arcs and shapes, not listed
Top Solder:
  text "IVClock2.2 sTeeLM 2026" at 34.671,66.373 h1.52
Bottom Solder:
  rectangle: 65.405,24.86 68.199,27.908
Mechanical 1:
  lines w0.254: 143.504,13.9 143.504,17.964 148.011,17.964 148.011,13.9 143.504,13.9
  text "V-CUT" at 164.65,126.201 h1.52 r90
  text "V-CUT" at 159.258,125.984 h1.52 r90
  text "V-CUT" at -16.383,62.611 h1.52
  text "V-CUT" at 210.693,62.484 h1.52
  text "V-CUT" at -16.383,57.531 h1.52
  text "V-CUT" at 210.439,57.277 h1.52
  text "CNC" at 139.192,50.038 h1.52
  text "CNC" at 170.942,29.956 h1.52
  text "CNC" at 190.627,11.017 h1.52
  text "V-CUT" at 164.465,-6.858 h1.52 r90
  text "V-CUT" at 159.385,-7.112 h1.52 r90
Mechanical 15:
  lines w0.254: 0,5 0,0 5,0 ; 140.351,37.56 148.479,37.56 148.479,48.609 140.351,48.609 140.351,37.56

## Text inside footprints (layer, text, board x,y; h text height)
BT1: Top Overlay "+" at 91.186,92.789 h4
C2: Top Overlay "+" at 22.672,107.802 h2.5
C13: Top Overlay "+" at 176.64,96.031 h5 r270
C15: Top Overlay "+" at 173.391,116.121 h1.5 r180
P1: Top Overlay "1" at 113.919,70.183 h1.27 r90; Top Overlay "2" at 106.553,70.183 h1.27 r90; Top Overlay "29" at 113.411,110.188 h1.27 r90; Top Overlay "30" at 107.061,110.442 h1.27 r90
P2: Top Overlay "1" at 1.397,68.532 h1.27 r90; Top Overlay "2" at 1.27,70.31 h1.27 r90; Top Overlay "4" at 1.27,71.326 h1.27 r90; Top Overlay "3" at 1.27,69.294 h1.27 r90
P4: Top Overlay "2" at 1.778,105.616 h1.27 r90; Top Overlay "1" at 9.398,105.616 h1.27 r90
P5: Top Overlay "1" at 174.371,43.926 h1.27 r90; Top Overlay "2" at 166.751,43.672 h1.27 r90; Top Overlay "4" at 169.388,48.058 h1.27 r90; Top Overlay "3" at 172.008,48.058 h1.27 r90
P6: Top Overlay "1" at 172.085,8.112 h1.27 r90; Top Overlay "2" at 169.468,8.18 h1.27 r90; Top Overlay "4" at 166.497,12.938 h1.27 r90; Top Overlay "3" at 174.625,13.319 h1.27 r90
P7: Top Overlay "1" at 172.008,70.18 h1.27 r90; Top Overlay "2" at 169.468,70.18 h1.27 r90; Top Overlay "29" at 175.387,109.934 h1.27 r90; Top Overlay "30" at 166.878,110.061 h1.27 r90
U1: Top Overlay "+" at 63.627,111.936 h1.52